# Altium PCB IPG_Rigid.PcbDoc (part 13 of 13)
Units mm, origin at the board's own origin, x right, y up, seen from the top; angles counter-clockwise.
Board outline 69.6 x 90.73 mm, 10 copper layers (TOP, DHOR, DVERT, GND 1, POWER, GND 2, GND 3, AVERT, AHOR, BOT), stack 1.198 mm thick; 745 components, 398 nets, 1997 pads, 2678 vias.
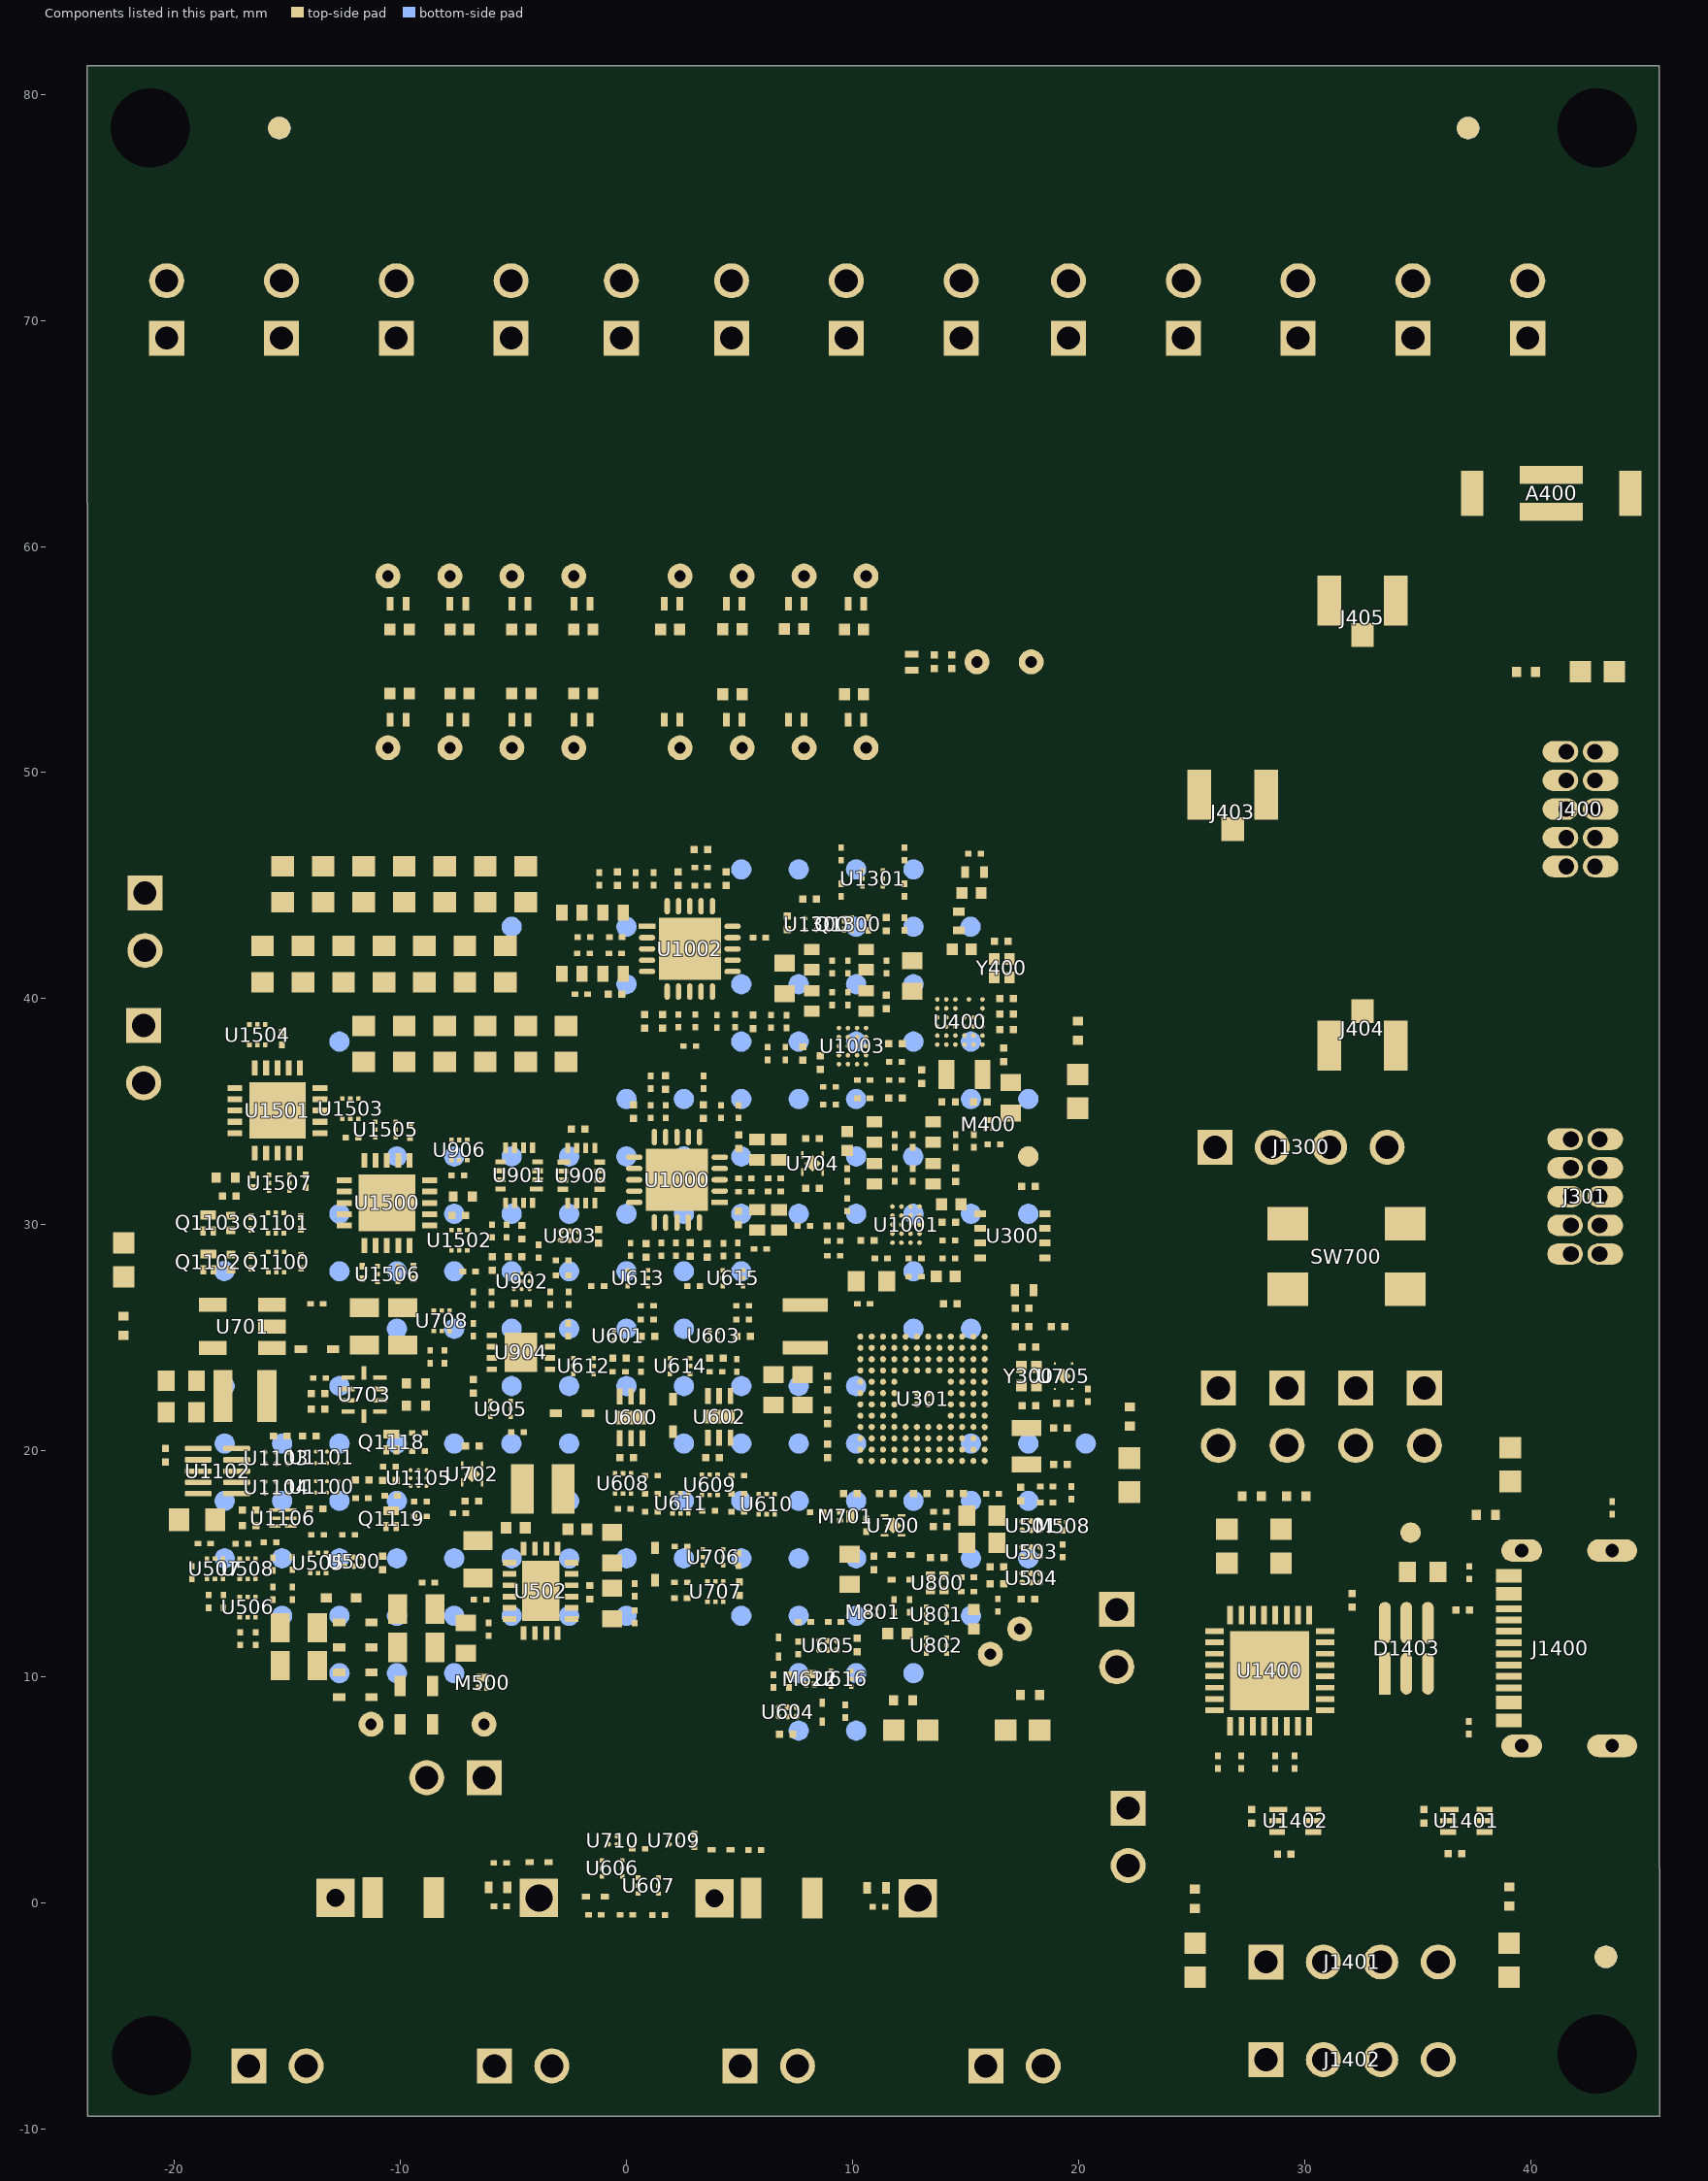
[diagram p17: the components of this part, seen from the top]

## Silkscreen, mask and mechanical layers (free items; w line width, h text height)
Top Overlay:
  region: 42.494,37.516 43.192,38.214 43.89,37.516
  region: 42.609,20.724 43.307,21.422 44.005,20.724
  lines w0.05: 5.563,35.484 5.563,36.017 ; 42.494,37.516 43.89,37.516 43.192,38.214 42.494,37.516 ; 42.609,20.724 43.307,21.422 44.005,20.724 42.609,20.724
  lines w0.1: 30.251,36.119 34.9,36.119 34.9,59.436 30.251,59.436 30.251,36.119
  lines w0.127: 42.291,38.386 42.285,39.394 42.291,40.402 42.285,41.417 42.285,42.419 42.285,43.427 ; 42.342,21.619 42.335,22.627 42.342,23.636 42.335,24.65 42.335,25.652 42.335,26.661 ; 44.018,39.394 40.564,39.394 ; 44.018,40.402 40.564,40.402 ; 44.018,41.411 40.564,41.423 ; 44.018,42.419 40.564,42.419 ; 44.069,22.627 40.615,22.627 ; 44.069,23.636 40.615,23.636 ; 44.069,24.644 40.615,24.657 ; 44.069,25.652 40.615,25.652 ; 40.564,39.394 40.564,38.386 44.018,38.386 44.018,39.414 44.018,40.506 44.018,41.408 44.018,42.386 44.018,43.427 42.285,43.427 ; 40.564,39.394 40.564,40.402 ; 40.564,40.402 40.564,41.423 ; 40.564,41.423 40.564,42.419 ; 40.564,42.419 40.564,43.427 42.285,43.427 ; 40.615,22.627 40.615,23.636 ; 40.615,22.627 40.615,21.619 44.069,21.619 44.069,22.647 44.069,23.74 44.069,24.641 44.069,25.619 44.069,26.661 42.335,26.661 ; 40.615,23.636 40.615,24.657 ; 40.615,24.657 40.615,25.652 ; 40.615,25.652 40.615,26.661 42.335,26.661
  lines w0.18: 24.257,46.406 24.257,59.69 35.204,59.69 35.204,35.865 29.972,35.865 29.972,36.576 29.972,38.837 29.972,43.866 29.972,45.517 29.972,45.796 29.972,46.406 24.257,46.406
  lines w0.25: 36.305,45.942 36.305,51.346 38.845,51.346 38.845,45.942 36.305,45.942 ; 36.533,28.997 36.533,34.077 39.073,34.077 39.073,28.997 36.533,28.997
  text "OpenNerve Gen2 Dev Board - Rev1" at -13.348,75.66 h1.52
  text "CH1" at -21.628,65.782 h1.1
  text "CH2" at -16.732,65.782 h1.1
  text "CH3" at -11.652,65.782 h1.1
  text "CH4" at -6.572,65.782 h1.1
  text "CH5" at -1.492,65.782 h1.1
  text "CH6" at 3.182,65.782 h1.1
  text "CH9" at 8.262,65.782 h1.1
  text "CH10" at 12.884,65.782 h1.1
  text "CH7" at 18.092,65.782 h1.1
  text "CH8" at 23.172,65.782 h1.1
  text "CH11" at 27.966,65.782 h1.1
  text "CH12" at 32.874,65.782 h1.1
  text "ENCL" at 37.862,65.782 h1.1
  text "STIM1" at -22.197,64.307 h0.89
  text "STIM2" at -17.265,64.307 h0.89
  text "STIM3" at -12.185,64.307 h0.89
  text "STIM4" at -7.105,64.307 h0.89
  text "ENG+" at -1.655,64.307 h0.89
  text "ENG-" at 3.019,64.307 h0.89
  text "HR+" at 8.543,64.307 h0.89
  text "HR-" at 13.623,64.307 h0.89
  text "ENG2+" at 17.484,64.307 h0.89
  text "ENG2-" at 22.564,64.307 h0.89
  text "RR+" at 28.522,64.307 h0.89
  text "RR-" at 33.613,64.307 h0.89
  text "RF" at 35.89,57.865 h1.27
  text "TESTING" at 35.89,56.109 h1.27
  text "BLE_RSTn" at 41.56,55.127 h0.4
  text "JTAG" at 39.98,51.969 h1.27
  text "BLE" at 38.539,46.248 h1.52 r90
  text "CH4" at -18.978,44.047 h0.5 r90
  text "RST" at 41.038,42.754 h0.33
  text "GND" at 42.74,42.754 h0.33
  text "NC" at 42.88,41.789 h0.33
  text "NC" at 41.178,41.764 h0.33
  text "NC" at 41.178,40.773 h0.33
  text "GND" at 42.714,40.773 h0.33
  text "CLK" at 40.987,39.757 h0.33
  text "GND" at 42.714,39.732 h0.33
  text "SWDIO" at 40.685,38.741 h0.33
  text "VDD" at 42.714,38.716 h0.33
  text "CH3" at -19.079,38.155 h0.5 r90
  text "I2C" at 25.476,36.173 h1.27
  text "JTAG" at 39.9,35.255 h1.27
  text "SCL" at 25.398,35.155 h0.44
  text "SDA" at 27.938,35.155 h0.44
  text "VDD" at 30.478,35.155 h0.44
  text "GND" at 33.018,35.155 h0.44
  text "BLE_CONN" at 21.477,34.167 h0.5 r90
  text "MCU" at 38.565,29.506 h1.52 r90
  text "HV_EN" at -20.788,27.233 h0.5 r90
  text "MCU / RESET" at 26.786,26.174 h1.02 r90
  text "RST" at 41.089,25.988 h0.33
  text "GND" at 42.791,25.988 h0.33
  text "NC" at 42.93,25.022 h0.33
  text "NC" at 41.229,24.997 h0.33
  text "MCU UART" at 24.817,24.726 h0.76
  text "BLE UART" at 31.141,24.726 h0.76
  text "SWO" at 41.063,24.006 h0.33
  text "GND" at 42.765,24.006 h0.33
  text "CLK" at 41.038,22.99 h0.33
  text "GND" at 42.765,22.965 h0.33
  text "SWDIO" at 40.735,21.974 h0.33
  text "VDD" at 42.765,21.949 h0.33
  text "SYS_RSTn" at 23.687,17.301 h0.5 r90
  text "VBUS" at 35.636,15.799 h0.6
  text "THERM_IN" at 20.091,14.707 h0.4
  text "THERM_OFST_IN" at 19.389,8.94 h0.4
  text "MAG_OUT" at 16.107,6.336 h0.5
  text "+DVDD" at 11.307,6.328 h0.5
  text "+VBUS" at 20.908,6.049 h0.5
  text "COIL_1" at -10.994,3.973 h0.5
  text "COIL_2" at -7.769,3.973 h0.5
  text "-" at 4.243,2.1 h1.2 r180
  text "TOP" at 40.691,1.549 h1.52
  text "+" at 12.495,1.145 h1.2
  text "+" at -2.669,1.068 h1.2
  text "-" at -13.311,0.9 h1.2
  text "+VCHG_RAIL" at 19.58,0.163 h0.5
  text "VBAT1R" at 28.245,-0.914 h0.51
  text "VBAT2R" at 33.452,-0.914 h0.51
  text "GND CONNECTOR" at 26.926,-5.207 h0.76
  text "VRECT" at -19.024,-5.321 h0.76
  text "GND" at -14.681,-5.321 h0.76
  text "VBAT1R" at -9.283,-5.321 h0.76
  text "GND" at -3.81,-5.321 h0.76
  text "VBAT2R" at 1.321,-5.321 h0.76
  text "GND" at 7.062,-5.321 h0.76
  text "VCHG_RAIL" at 11.317,-5.321 h0.76
  text "GND" at 18.568,-5.321 h0.76
Bottom Overlay:
  text "HORNET-IPG" at 4.723,55.147 h1
  text "Ver .VerMay..VerMin Rev .Rev" at 6.722,53.98 h1
  text "BOTTOM" at 39.546,-0.533 h1.52
M2_RigidBoard:
  lines w0.127: -23.851,-9.449 45.72,-9.449 45.72,81.254 -23.851,81.254 -23.851,-9.449
Sheet:
  circle w0.127: c-12.879,0.221 r0.303
  circle w0.127: c-12.879,0.221 r0.303
  circle w0.127: c-3.875,0.221 r0.456
  circle w0.127: c-3.875,0.221 r0.456
  circle w0.127: c12.879,0.221 r0.303
  circle w0.127: c12.879,0.221 r0.303